# Altium PCB Gastroscopy-Tool-Input.PcbDoc
Units mm, origin at the board's own origin, x right, y up, seen from the top; angles counter-clockwise.
Board outline 14.8 x 14.8 mm, 4 copper layers (Top Layer, Layer 4 (GND), Layer 5 (PWR), Bottom Layer), stack 1.49 mm thick; 5 components, 4 nets, 15 pads, 0 vias.
Unrouted connection lines stored in the file: 6.
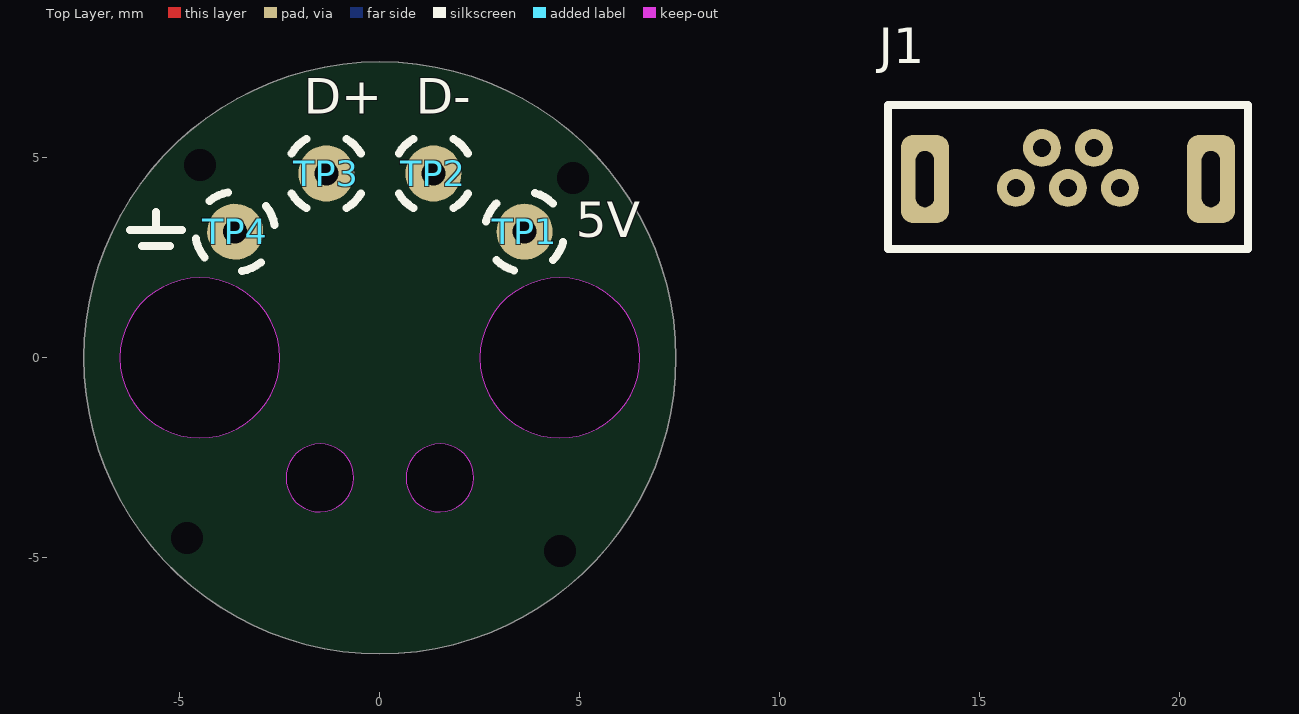
[diagram p0: Top Layer view]
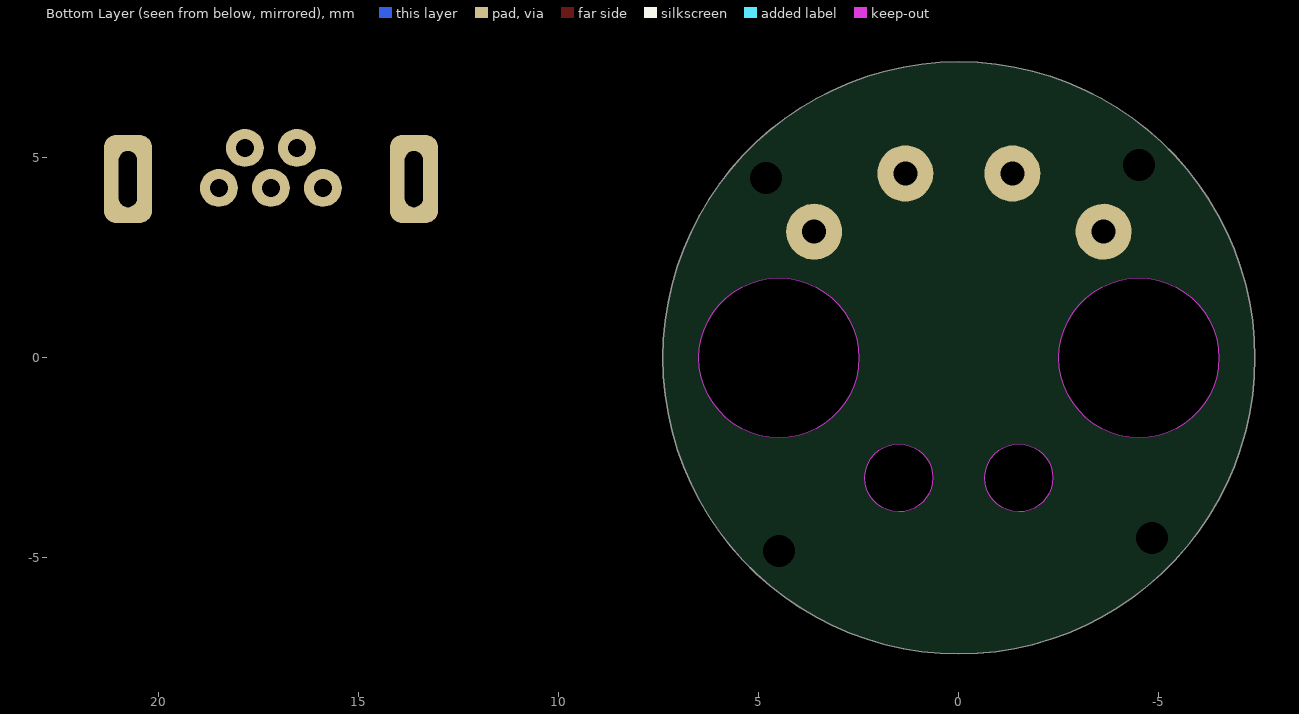
[diagram p1: Bottom Layer view, seen from below]

## Layer stack, top to bottom
Top Solder: solder mask 0.0127, Dk 4
Top Layer: signal copper 0.018
Prepreg 1: prepreg 0.127, Dk 4.2
Layer 4 (GND): signal copper 0.018
Core 2: core 1.164, Dk 4.2
Layer 5 (PWR): signal copper 0.018
Prepreg 4: prepreg 0.127, Dk 4.2
Bottom Layer: signal copper 0.018
Bottom Solder: solder mask 0.0127, Dk 4

## Board outline
-7.4,0 ccw(c0,0) 0,-7.4 ccw(c0,0) 7.4,0 ccw(c0,0) 0,7.4 ccw(c0,0)
cut-out: 1.504,-3.85 ccw(c1.497,-2.997) 2.35,-3 ccw(c1.503,-2.997) 1.504,-2.15 ccw(c1.503,-2.999) 0.654,-3 ccw(c1.497,-3.007)
cut-out: -1.496,-3.85 ccw(c-1.503,-2.997) -0.65,-3 ccw(c-1.497,-2.997) -1.496,-2.15 ccw(c-1.497,-2.999) -2.346,-3 ccw(c-1.503,-3.007)
cut-out: -6.5,0 ccw(c-4.5,0.001) -4.5,-2 ccw(c-4.5,-0.001) -2.5,0 ccw(c-4.501,-0.001) -4.5,2 ccw(c-4.501,0.001)
cut-out: 2.5,0 ccw(c4.5,0.001) 4.5,-2 ccw(c4.5,-0.001) 6.5,0 ccw(c4.499,-0.001) 4.5,2 ccw(c4.499,0.001)

## Design rules (kind name [scope] priority, off if disabled: settings)
BoardOutlineClearance [All] p1: gap=0.508 ignorepadtopadclearanceinfootprint=FALSE
Clearance Clearance_CHASSIS [InNet('CHASSIS')] p1: gap=0.508 ignorepadtopadclearanceinfootprint=FALSE // ETH chassis to other
Clearance Clearance_TP [HasFootprint('TEST_POINT_TH')] p2: gap=0.508 ignorepadtopadclearanceinfootprint=FALSE // Test point for programming
Clearance Clearance_ETH_VDDA [InNamedPolygon('ETH_VDDA') vs InNamedPolygon('SOLID_3V3_LAYER5')] p3: gap=0.127 ignorepadtopadclearanceinfootprint=FALSE except(0.508: Fill-Fill Fill-Poly Fill-Region Poly-Poly Poly-Region Region-Region) // ETH_VDDA clearance to 3V3 polygon
Clearance Clearance_VCC_PLANE [InNamedPolygon('SOLID_3V3_LAYER5')] p4: gap=0.178 ignorepadtopadclearanceinfootprint=FALSE // Clearance between 3V3 VCC plane and vias
Clearance Clearance_Signal_Via [IsLinkedToPadViaTemplate('signal_via')] p5: gap=0.127 ignorepadtopadclearanceinfootprint=FALSE except(0.178: Via-Fill Via-Poly Via-Region) // 50 Ohm via, clearance to GND plane and to other polygons
Clearance Clearance_3W [OnLayer('Layer 3 (SIG)')] p6: gap=0.127 ignorepadtopadclearanceinfootprint=FALSE except(0.254: Arc-Arc Arc-Track Arc-SMDPad Arc-THPad Arc-Via Arc-Fill Arc-Poly Arc-Region Arc-Text Arc-Hole Track-Track Track-SMDPad Track-THPad Track-Via Track-Fill Track-Poly Track-Region Track-Text Track-Hole) // 3W rule for high-speed nets; applicable for 5mil tracks
Clearance [All] p7: gap=0.127 ignorepadtopadclearanceinfootprint=FALSE except(0.26: Arc-Hole Track-Hole SMDPad-Hole THPad-Hole Via-Hole Fill-Hole Poly-Hole Region-Hole Text-Hole) // Track-Track 7 mil for MCU
ComponentClearance ComponentClearance_TERMINALS [HasFootprint('DG128-5.0-03P-14') or HasFootprint('DG128-5.0-02P-14')] p1: gap=0 collisioncheckmode=3 verticalgap=0 showdistances=FALSE
ComponentClearance [All] p2: gap=0.508 collisioncheckmode=3 verticalgap=1.016 showdistances=FALSE donotcheckwithout3dbody=TRUE
DiffPairsRouting DiffPairsRouting_RS485 [InDifferentialPairClass('RS485_DIFFPAIR')] p1: maxlimit=0.305 minlimit=0.305 mostfreqgap=0.305 toplayer_minwidth=0.178 toplayer_maxwidth=0.178 toplayer_prefwidth=0.178 midlayer3_minwidth=0.178 midlayer3_maxwidth=0.178 midlayer3_prefwidth=0.178 midlayer4_minwidth=0.178 midlayer4_maxwidth=0.178 midlayer4_prefwidth=0.178 bottomlayer_minwidth=0.178 bottomlayer_maxwidth=0.178 bottomlayer_prefwidth=0.178 maxuncoupledlength=12.7 // 120 Ohm differential impedance
DiffPairsRouting DiffPairsRouting_USB [InDifferentialPairClass('USB_DIFFPAIR')] p2: maxlimit=0.127 minlimit=0.1 mostfreqgap=0.127 toplayer_mingap=0.127 toplayer_minwidth=0.19 toplayer_maxwidth=0.19 toplayer_prefwidth=0.19 bottomlayer_mingap=0.127 bottomlayer_minwidth=0.19 bottomlayer_maxwidth=0.19 bottomlayer_prefwidth=0.19 impedanceprofiledriven=TRUE impedanceprofileid={13F299FD-EDF9-4D52-ACC5-885CEE12CEAA} impedanceprofilevalue=90.000000 maxuncoupledlength=1.016 // 90 Ohm differential impedance
DiffPairsRouting DiffPairsRouting_MDI [InDifferentialPairClass('MDI_DIFFPAIR')] p3: maxlimit=0.127 minlimit=0.127 mostfreqgap=0.127 toplayer_minwidth=0.203 toplayer_maxwidth=0.203 toplayer_prefwidth=0.203 midlayer3_minwidth=0.203 midlayer3_maxwidth=0.203 midlayer3_prefwidth=0.203 midlayer4_minwidth=0.203 midlayer4_maxwidth=0.203 midlayer4_prefwidth=0.203 bottomlayer_minwidth=0.203 bottomlayer_maxwidth=0.203 bottomlayer_prefwidth=0.203 maxuncoupledlength=1.016 // 100 Ohm differential impedance
HoleSize [All] p1: absolutevalues=TRUE maxlimit=6.35 minlimit=0.254 maxpercent=80.000 minpercent=20.000
HoleToHoleClearance [All] p1: gap=0.381 allowstackedmicrovias=TRUE
MatchedLengths MatchLengths_xSignals_LCD [InxSignalClass('xSignals_LCD')] p1: tolerance=1.016 checknetsindiffpair=FALSE checkdiffpairvsdiffpair=TRUE checkxsignals=TRUE checkothers=TRUE usedelayunits=TRUE delaytolerance=100.000000 targetsourcename=LCD_CLK-LCD_CLK_MCU_PP1
MatchedLengths MatchLengths_xSignals_ETH [InxSignalClass('xSignals_ETH')] p2: tolerance=1.016 checknetsindiffpair=FALSE checkdiffpairvsdiffpair=TRUE checkxsignals=TRUE checkothers=TRUE usedelayunits=TRUE delaytolerance=100.000000 targetsourcename=ETH_CLK-ETH_RMII_CLK_PP1
MatchedLengths MatchLengths_xSignals_FMC [InxSignalClass('xSignals_FMC')] p3: tolerance=1.016 checknetsindiffpair=FALSE checkdiffpairvsdiffpair=TRUE checkxsignals=TRUE checkothers=TRUE usedelayunits=TRUE delaytolerance=100.000000 targetsourcename=FMC_CLK-FMC_CLK_MCU_PP1
MatchedLengths MatchLengths_xSignals_SDC [InxSignalClass('xSignals_SDC')] p4: tolerance=1.016 checknetsindiffpair=FALSE checkdiffpairvsdiffpair=TRUE checkxsignals=TRUE checkothers=TRUE usedelayunits=TRUE delaytolerance=100.000000 targetsourcename=SDMMC1_SDCARD_CK-SDMMC1_SDCARD_CK_MCU_PP1
MatchedLengths MatchedLengths_Diff_Grouped_MDI [InDifferentialPairClass('MDI_DIFFPAIR')] p5: tolerance=1.016 checknetsindiffpair=FALSE checkdiffpairvsdiffpair=TRUE checkxsignals=TRUE checkothers=TRUE
MatchedLengths MatchedLengths_Diff_Within_MDI [InDifferentialPairClass('MDI_DIFFPAIR')] p6: tolerance=1.016 checknetsindiffpair=TRUE checkdiffpairvsdiffpair=FALSE checkxsignals=FALSE checkothers=FALSE
MatchedLengths MatchedLengths_Diff_Within_RS485 [InDifferentialPairClass('RS485_DIFFPAIR')] p7: tolerance=2.54 checknetsindiffpair=TRUE checkdiffpairvsdiffpair=FALSE checkxsignals=FALSE checkothers=FALSE
MatchedLengths MatchedLengths_Diff_Within_USB [InDifferentialPairClass('USB_DIFFPAIR')] p8: tolerance=1.016 checknetsindiffpair=TRUE checkdiffpairvsdiffpair=FALSE checkxsignals=FALSE checkothers=FALSE
MinimumAnnularRing [All] p1: minimumring=0.127
MinimumSolderMaskSliver [All] p1: minsoldermaskwidth=0.05
PlaneConnect [All] p1: planeconnectstyle=Direct reliefexpansion=0.508 reliefentries=4 reliefconductorwidth=0.254 reliefairgap=0.254
PolygonConnect PolygonConnect_POWER_IN_VIN [InNet('VIN+') Or InNet('VIN-') vs HasFootprint('1250360000') Or HasFootprint('1250370000')] p1: connectstyle=Relief reliefconductorwidth=1.27 reliefentries=4 polygonreliefangle="90 Angle" airgapwidth=0.127 // POWER IN terminal blocks to VIN
PolygonConnect PolygonConnect_POWER_TVS_VIN [InNet('VIN+') Or InNet('VIN-') vs HasFootprint('SMA-BIDIR')] p2: connectstyle=Relief reliefconductorwidth=1.27 reliefentries=4 polygonreliefangle="90 Angle" airgapwidth=0.127 // POWER IN TVS diode to VIN
PolygonConnect PolygonConnect_POWER_FUSE [HasFootprint('0ZRS0200FF1E')] p3: connectstyle=Relief reliefconductorwidth=1.27 reliefentries=4 polygonreliefangle="90 Angle" airgapwidth=0.127 // POWER IN fuse
PolygonConnect PolygonConnect_POWER_SWITCH [HasFootprint('48BFSP1M2QT')] p4: connectstyle=Relief reliefconductorwidth=1.016 reliefentries=4 polygonreliefangle="90 Angle" airgapwidth=0.127 // POWER switch
PolygonConnect PolygonConnect_POWER_FILTER [HasFootprint('BNX022-01L')] p5: connectstyle=Relief reliefconductorwidth=2.032 reliefentries=4 polygonreliefangle="90 Angle" airgapwidth=0.127 // POWER filter FL1
PolygonConnect PolygonConnect_POWER_IN_MOSFET [InComponent('Q1')] p6: connectstyle=Relief reliefconductorwidth=0.381 reliefentries=4 polygonreliefangle="90 Angle" airgapwidth=0.127 // Q1 reverse polarity protection MOSFET
PolygonConnect PolygonConnect_MOSFET_ZENER [InComponent('D2')] p7: connectstyle=Relief reliefconductorwidth=0.508 reliefentries=4 polygonreliefangle="90 Angle" airgapwidth=0.127 // Q1 MOSFET gate voltage stabilizer
PolygonConnect PolygonConnect_DCDC_IC [HasFootprint('SOIC-8EP_150MIL') vs InNet('GND')] p8: connectstyle=Relief reliefconductorwidth=2.032 reliefentries=4 polygonreliefangle="90 Angle" airgapwidth=0.127 // DC/DC IC connection
PolygonConnect PolygonConnect_DCDC_CAPS [(WithinRoom('DC/DC Step-Down Converter 12V') Or WithinRoom('DC/DC Step-Down Converter 3.3V')) And HasFootprint('CAP_1210')] p9: connectstyle=Relief reliefconductorwidth=1.27 reliefentries=4 polygonreliefangle="90 Angle" airgapwidth=0.127 // DC/DC input and output capacitors
PolygonConnect PolygonConnect_ETH_BULKCAP [WithinRoom('10/100 Mbps Ethernet PHY') And HasFootprint('CAP_1210')] p10: connectstyle=Relief reliefconductorwidth=1.27 reliefentries=4 polygonreliefangle="90 Angle" airgapwidth=0.127 // 1210 bulck capacitor in ETH power supply
PolygonConnect PolygonConnect_DCDC_IND [(InNet('12V') Or InNet('3V3')) And HasFootprint('SRU1048')] p11: connectstyle=Relief reliefconductorwidth=1.778 reliefentries=4 polygonreliefangle="90 Angle" airgapwidth=0.127 // DC/DC inductors terminal in specific nets
PolygonConnect PolygonConnect_DCDC_5V_IC [HasFootprint('SOT-23-6') vs (InNet('GND') Or InNet('12V')) And WithinRoom('USB 2.0 Full-Speed')] p12: connectstyle=Relief reliefconductorwidth=0.584 reliefentries=4 polygonreliefangle="90 Angle" airgapwidth=0.127 // DC/DC 5V IC connection
PolygonConnect PolygonConnect_DCDC_5V_CAPS [HasFootprint('CAP_1210') vs InNet('5V')] p13: connectstyle=Direct reliefconductorwidth=1.27 reliefentries=4 polygonreliefangle="90 Angle" airgapwidth=0.3 // Caps connection to GND and VCC polygons
PolygonConnect PolygonConnect_DCDC_5V_OUT_CAP [InNet('5V') And HasFootprint('CAP_0603')] p14: connectstyle=Relief reliefconductorwidth=0.813 reliefentries=4 polygonreliefangle="90 Angle" airgapwidth=0.127 // Output cap connection to VCC polygon
PolygonConnect PolygonConnect_DCDC_5V_IND [HasFootprint('SDR1006')] p15: connectstyle=Direct reliefconductorwidth=0.8 reliefentries=4 polygonreliefangle="90 Angle" airgapwidth=0.3 // DC/DC 5V inductor terminal in specific nets
PolygonConnect PolygonConnect_DCDC_HOTSWITCH [InNet('NetC4_2')] p16: connectstyle=Relief reliefconductorwidth=0.8 reliefentries=4 polygonreliefangle="90 Angle" airgapwidth=0.3 // DC/DC 5V inductor terminal in specific nets
PolygonConnect PolygonConnect_DCDC_BL_IC [WithinRoom('LCD & Capacitive Touchscreen Module') And HasFootprint('SOT-23-6')] p17: connectstyle=Relief reliefconductorwidth=0.584 reliefentries=4 polygonreliefangle="90 Angle" airgapwidth=0.127 // DC/DC Backlight IC
PolygonConnect PolygonConnect_DCDC_BL_CAPS [WithinRoom('LCD & Capacitive Touchscreen Module') And HasFootprint('CAP_0805')] p18: connectstyle=Relief reliefconductorwidth=1.016 reliefentries=4 polygonreliefangle="90 Angle" airgapwidth=0.127 // DC/DC Backlight capacitors
PolygonConnect PolygonConnect_DCDC_BL_IND [WithinRoom('LCD & Capacitive Touchscreen Module') And HasFootprint('LQH3NPN470MMEL')] p19: connectstyle=Relief reliefconductorwidth=0.965 reliefentries=4 polygonreliefangle="90 Angle" airgapwidth=0.127 // DC/DC Backlight inductor
PolygonConnect PolygonConnect_WIFI_GND [InNet('GND') And HasFootprint('ATWINC3400-MR210CA142')] p20: connectstyle=Relief reliefconductorwidth=0.762 reliefentries=4 polygonreliefangle="90 Angle" airgapwidth=0.127 // WiFi module to GND poly
PolygonConnect PolygonConnect_USB_CONN_GND [InNet('GND') vs HasFootprint('USB3106-30-0230-A')] p21: connectstyle=Relief reliefconductorwidth=0.508 reliefentries=4 polygonreliefangle="90 Angle" airgapwidth=0.203 // USB connector GND
PolygonConnect PolygonConnect_FB [HasFootprint('FB_1206')] p22: connectstyle=Relief reliefconductorwidth=1.143 reliefentries=4 polygonreliefangle="90 Angle" airgapwidth=0.127 // Ferrite Bead to poly
PolygonConnect PolygonConnect_FUSE [HasFootprint('PTC_1812')] p23: connectstyle=Relief reliefconductorwidth=1.778 reliefentries=4 polygonreliefangle="90 Angle" airgapwidth=0.127 // Fuse to poly
PolygonConnect PolygonConnect_12V_OUT_SMA [(WithinRoom('RS-485 Interface') Or WithinRoom('Wiegand Interface')) And HasFootprint('SMA')] p24: connectstyle=Relief reliefconductorwidth=1.524 reliefentries=4 polygonreliefangle="90 Angle" airgapwidth=0.127 // TVS diodes in SMA package, 12V output polygons
PolygonConnect PolygonConnect_TP_GND [InNet('GND') vs HasFootprint('TEST_POINT_TH') Or HasFootprint('TEST_POINT_SMT')] p25: connectstyle=Relief reliefconductorwidth=0.508 reliefentries=4 polygonreliefangle="90 Angle" airgapwidth=0.508 // Test points to GND
PolygonConnect PolygonConnect_ETH_CHASSIS [InNet('CHASSIS')] p26: connectstyle=Relief reliefconductorwidth=1.016 reliefentries=4 polygonreliefangle="90 Angle" airgapwidth=0.381 // ETH Chassis
PolygonConnect PolygonConnect_VIA [IsVia] p27: connectstyle=Direct reliefconductorwidth=0.8 reliefentries=4 polygonreliefangle="90 Angle" airgapwidth=0.3
PolygonConnect [All] p28: connectstyle=Relief reliefconductorwidth=0.8 reliefentries=4 polygonreliefangle="90 Angle" airgapwidth=0.3
ReturnPath [OnLayer('Layer 3 (SIG)')] p1: _gaplimit=0.127
RoutingVias [All] p1: holewidth=0.254 width=0.66 viastyle="Through Hole" minholewidth=0.254 minwidth=0.66 maxholewidth=1.016 maxwidth=1.422 useviatemplates=TRUE viatemplateguid#1={79E6DCE3-D317-4519-9061-2CDD01818D80} viatemplateguid#2={DB4F5FA1-A2BD-4F5F-94AF-CFE80AD55038} viatemplatename#1=power_via viatemplatename#2=signal_via
SilkToSilkClearance [All] p1: silktosilkclearance=0.051
SilkToSolderMaskClearance [All] p1: minsilkscreentomaskgap=0.051 clearancetoexposedcopper=FALSE
SolderMaskExpansion SolderMaskExpansion_LQFP176 [HasFootprint('LQFP176')] p1: expansion=0.102 istentingtop=FALSE
SolderMaskExpansion SolderMaskExpansion_TSSOP-14 [HasFootprint('TSSOP-14')] p2: expansion=0.102 istentingtop=FALSE
SolderMaskExpansion SolderMaskExpansion_TSOP-54 [HasFootprint('TSOP-54-II')] p3: expansion=0.127 istentingtop=FALSE
SolderMaskExpansion SolderMaskExpansion_SDCard [HasFootprint('475710001')] p4: expansion=0.102 istentingtop=FALSE
SolderMaskExpansion SolderMaskExpansion_LCD_conns [HasFootprint('62684-402100AHLF') Or HasFootprint('0527460671')] p5: expansion=0.102 istentingtop=FALSE
SolderMaskExpansion SolderMaskExpansion_Via [IsVia] p6: expansion=0.152 istentingtop=TRUE
SolderMaskExpansion [All] p7: expansion=0.076 istentingtop=FALSE
UnRoutedNet [All] p1: checkbadconnections=TRUE
Width Width_Signal_Buried [OnLayer('Layer 3 (SIG)') And  Not InNet('5V')] p1: maxlimit=0.127 minlimit=0.127 preferedwidth=0.127 // 50 Ohm track on buried layers
Width [All] p2: maxlimit=2.54 minlimit=0.127 preferedwidth=0.3 // 50 Ohm track on top and bottom layers
21 further rules are at their usual default settings.

## Classes and differential pairs
differential pair class USB_DIFFPAIR: D MCU_USB_D USB
differential pair USB: +USB_P -USB_N

## Components (designator, comment, footprint, x,y, rotation, side; value= is the part's Value field where it differs from the comment)
J1 "614105150721" 614105150721 17.2,4.525 r180 top
TP1 "TEST_POINT_TH" TEST_POINT_TH 3.618,3.155 r15 top
TP2 "TEST_POINT_TH" TEST_POINT_TH 1.338,4.61 r0 top
TP3 "TEST_POINT_TH" TEST_POINT_TH -1.338,4.61 r0 top
TP4 "TEST_POINT_TH" TEST_POINT_TH -3.618,3.155 r70 top

## Footprints (in the part's own frame and the unit in brackets; to place one, negate y for a bottom-side part, rotate by r counter-clockwise, add the part's x,y. Pads: shape width x height; smd on the part's side, far side on the other; paste and mask are expansions set on the pad)
614105150721 [mm]
  round 0.95 hole 0.45: 1(-1.3,0.275) 2(-0.65,-0.725) 3(0,0.275) 4(0.65,-0.725) 5(1.3,0.275)
  rrect50% 1.2x2.2 hole 0.45 slot 1.4 at 90 deg: 6(-3.575,0.055) 6(3.575,0.055)
  silkscreen extent -4.5,-1.8 4.5,1.8, body extent -4,-1.51 4,1.51, height 6.94
TEST_POINT_TH [mm] "TH test point, 100 mil pad, 60 mil hole"
  round 1.4 hole 0.6: 1(0,0)
  silkscreen extent -0.87,-0.87 0.87,0.87

## Part data
J1: "CONN RCPT USB2.0 MICRO B VERT", Manufacturer 1="Wurth Electronics", Supplier Part Number 1=1225097P, Category="USB Connectors", ComponentLink1Description=https://www.distrelec.biz/Web/Downloads/40/30/614105150721.pdf?mime=application%2Fpdf&src-supplier=Distrelec, ComponentLink1URL=https://www.distrelec.biz/Web/Downloads/40/30/614105150721.pdf?mime=application%2Fpdf&src-supplier=Distrelec, ComponentLink2Description=http://www.farnell.com/cad/2130953.pdf?src-supplier=Element14, ComponentLink2URL=http://www.farnell.com/cad/2130953.pdf?src-supplier=Element14, ComponentLink3Description=https://katalog.we-online.de/em/datasheet/614105150721.pdf?src-supplier=Digi-Key, ComponentLink3URL=https://katalog.we-online.de/em/datasheet/614105150721.pdf?src-supplier=Digi-Key, Connector Type=USB, Contact Material="Copper Alloy", Contact Plating=Gold, Features=Shielded, Gender=Receptacle, Lead Free="Lead Free", Manufacturer Part Number 1=614105150721, Mount="Through Hole,Vertical", Number of Contacts=5, Orientation=Vertical, Packaging="Tape and Reel", Pricing 1="10=1,69000, 50=1,53000, 100=1,45000, 250=1,41000 (GBP)", Reach SVHC Compliant=Unknown, RoHS=Yes, RoHS Compliant=Yes, Stock 1=1957, Supplier 1=RSComponents, USB Standard="USB 2.0"
TP1 TP2 TP3 TP4: "TH TETS POINT"

## Free pads (board coordinates)
  round 0 hole 0.8 unplated: ""(-4.828,-4.5) ""(-4.5,4.828) ""(4.5,-4.828) ""(4.828,4.5)

## Nets (pads, with @x,y where several pads share a name; then routed paths per layer and width w, separated by ;. In a path a pad name is that pad's centre, name@x,y a point inside that pad or via, vN(x,y) a via of type N, cw(c..) or ccw(c..) an arc to the next point about the centre after c; other vN are vias at no path point)
5V: J1.1 TP1.1
GND: J1.5 J1.6 TP4.1
USB_N: J1.2 TP2.1
USB_P: J1.3 TP3.1
pads on no net: J1.4

## Silkscreen, mask and mechanical layers (free items; w line width, h text height)
Top Overlay:
  lines w0.2: -6.25,3.2 -4.95,3.2 ; -5.95,2.8 -5.25,2.8 ; -5.6,3.2 -5.6,3.65
  text "D+" at -1.9,5.8 h1.52
  text "D-" at 0.9,5.8 h1.52
  text "5V" at 4.9,2.716 h1.52
Board Outline:
  circle w0.013: c-1.5,-3 r0.85
  circle w0.013: c1.5,-3 r0.85
  circle w0.013: c4.5,0 r2
  circle w0.013: c-4.5,0 r2
  circle w0.013: c0,0 r7.4